# Altium PCB 3xVCO.PcbDoc
Units mm, origin at the board's own origin, x right, y up, seen from the top; angles counter-clockwise.
Board outline 69.8 x 106.5 mm, 2 copper layers (Top Layer, Bottom Layer); 122 components, 85 nets, 354 pads, 256 vias.
Unrouted connection lines stored in the file: 59.
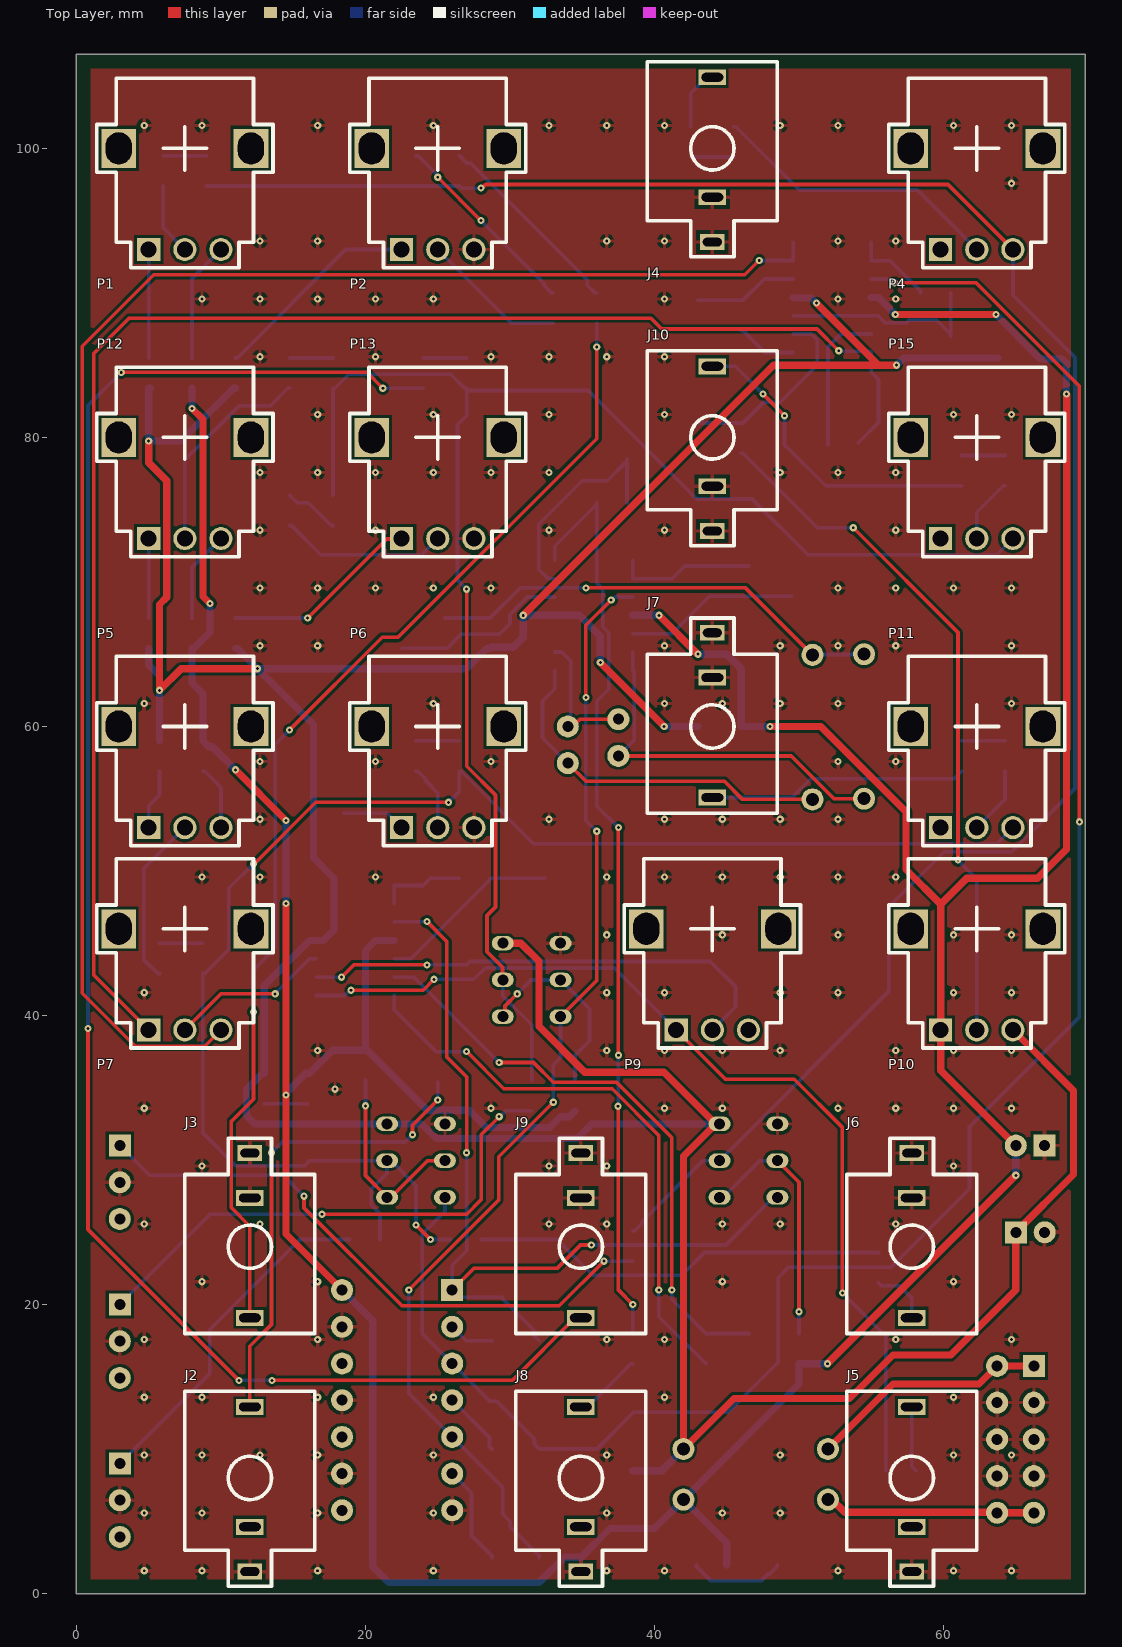
[diagram p0: Top Layer view]
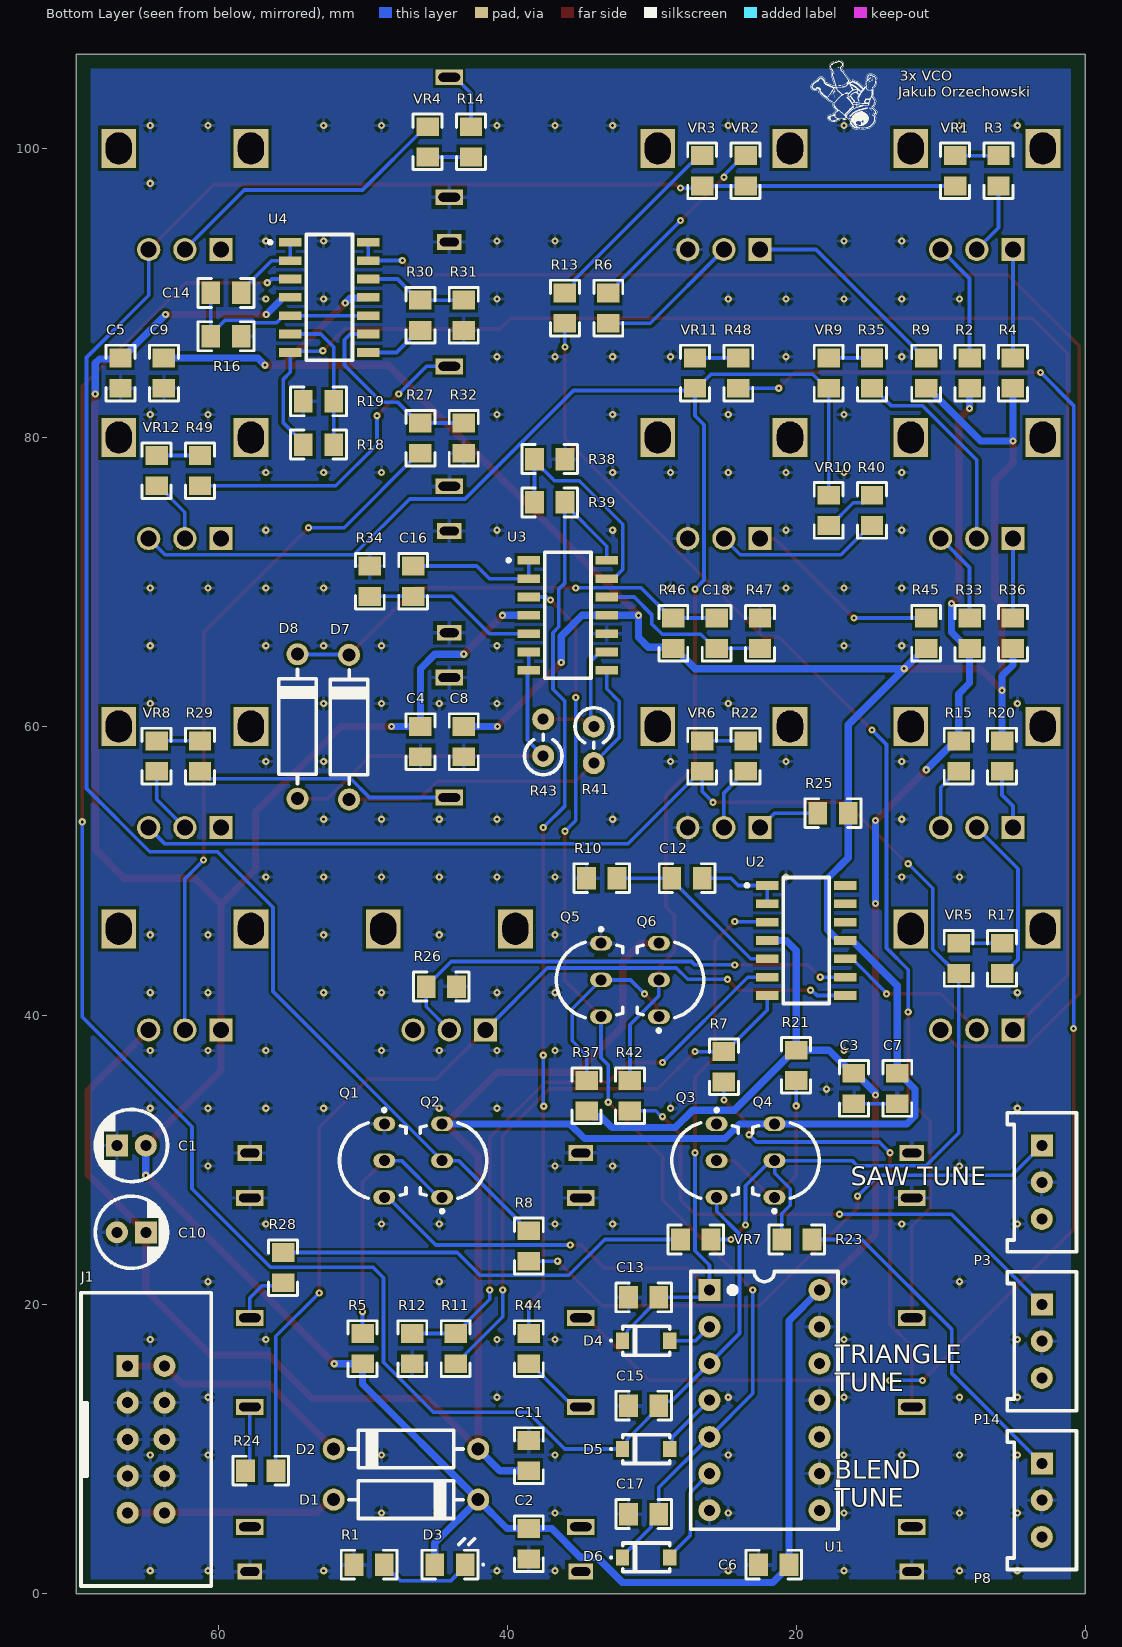
[diagram p1: Bottom Layer view, seen from below]
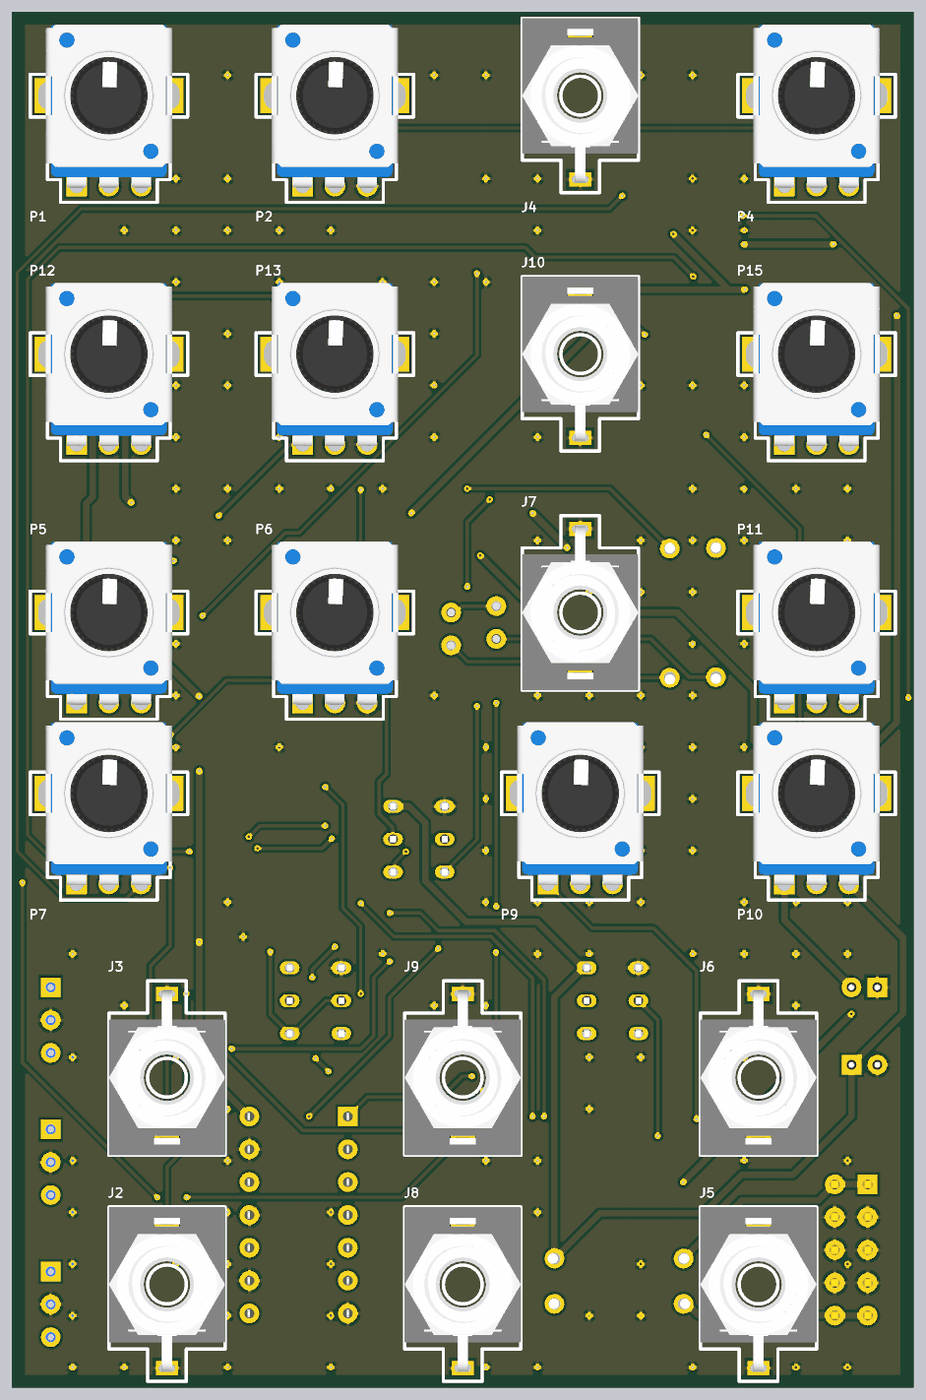
[diagram p2: 3D render of the assembled board from above, using the file's embedded part models]

## Layer stack, top to bottom
Top Solder: solder mask 0.0102, Solder Resist, Dk 3.5
Top Layer: signal copper 0.0356
Dielectric 1: dielectric 0.32, FR-4, Dk 4.8
Bottom Layer: signal copper 0.0356
Bottom Solder: solder mask 0.0102, Solder Resist, Dk 3.5

## Board outline
0,0 0,106.5 69.8,106.5 69.8,0

## Design rules (kind name [scope] priority, off if disabled: settings)
Clearance [All] p1: gap=0.2 ignorepadtopadclearanceinfootprint=FALSE except(0.25: Arc-Hole Track-Hole SMDPad-Hole THPad-Hole Via-Hole Fill-Hole Poly-Hole Region-Hole Text-Hole)
HoleSize [All] p1: absolutevalues=TRUE maxlimit=6.2 minlimit=0 maxpercent=80.000 minpercent=20.000
HoleToHoleClearance [All] p1: gap=0.3 allowstackedmicrovias=TRUE
MinimumSolderMaskSliver [All] p1: minsoldermaskwidth=0.2
PolygonConnect [All] p1: connectstyle=Relief reliefconductorwidth=0.254 reliefentries=4 polygonreliefangle="90 Angle" airgapwidth=0.254
RoutingVias [All] p1: holewidth=0.2 width=0.5 viastyle="Through Hole" minholewidth=0.15 minwidth=0.3 maxholewidth=0.711 maxwidth=1.27
SilkToSilkClearance [All] p1: silktosilkclearance=0.15
SilkToSolderMaskClearance [IsPad] p1: minsilkscreentomaskgap=0.1 clearancetoexposedcopper=TRUE
SolderMaskExpansion [All] p1: expansion=0.05 istentingtop=FALSE
SupplyNets "Schematic Supply Nets_2" [InNet('-12 V')] p1: voltage=0.000
SupplyNets "Schematic Supply Nets_1" [InNet('GND')] p2: voltage=0.000
SupplyNets "Schematic Supply Nets" [InNet('+12 V')] p3: voltage=0.000
Width [All] p1: maxlimit=0.5 minlimit=0.2 preferedwidth=0.254
25 further rules are at their usual default settings.

## Classes and differential pairs
component class "Triangle VCO": C16 C17 C18 D6 D7 D8 J8 J9 J10 P12 P13 P14 P15 Q5 Q6 R33 R34 R35 R36 R37 R38 R39 R40 R41 R42 R43 R44 R45 R46 R47 R48 R49 U3 VR9 VR10 VR11 VR12
component class "Blend VCO": C14 C15 D5 J5 J6 J7 P5 P6 P7 P8 P9 P10 P11 Q3 Q4 R15 R16 R17 R18 R19 R20 R21 R22 R23 R24 R25 R26 R27 R28 R29 R30 R31 R32 U4 VR5 VR6 VR7 VR8
component class "Saw VCO": C12 C13 D4 J2 J3 J4 P1 P2 P3 P4 Q1 Q2 R2 R3 R4 R5 R6 R7 R8 R9 R10 R11 R12 R13 R14 U1 U2 VR1 VR2 VR3 VR4
component class "Power section": C1 C2 C3 C4 C5 C6 C7 C8 C9 C10 C11 D1 D2 D3 J1 R1

## Components (designator, comment, footprint, x,y, rotation, side; value= is the part's Value field where it differs from the comment)
C1 "CAP" "Cap electrolytic THT 5mm" 67,31 r180 bottom value=47uF
C2 "CAP" "Cap SMD 0805" 38.5,2.4 r90 bottom value=100nF
C3 "CAP" "Cap SMD 0805" 16,33.9 r90 bottom value=100nF
C4 "CAP" "Cap SMD 0805" 46,57.9 r90 bottom value=100nF
C5 "CAP" "Cap SMD 0805" 66.75,83.4 r90 bottom value=100nF
C6 "CAP" "Cap SMD 0805" 22.6,2 r180 bottom value=100nF
C7 "CAP" "Cap SMD 0805" 13,36 r270 bottom value=100nF
C8 "CAP" "Cap SMD 0805" 43,60 r270 bottom value=100nF
C9 "CAP" "Cap SMD 0805" 63.75,85.5 r270 bottom value=100nF
C10 "CAP" "Cap electrolytic THT 5mm" 65,25 r0 bottom value=47uF
C11 "CAP" "Cap SMD 0805" 38.5,8.5 r90 bottom value=100nF
C12 "CAP" "Cap SMD 0805" 28.6,49.5 r180 bottom value=1uF
C13 "CAP" "Cap SMD 0805" 31.6,20.5 r180 bottom value=2,2nF
C14 "CAP" "Cap SMD 0805" 60.5,90 r180 bottom value=1uF
C15 "CAP" "Cap SMD 0805" 31.6,13 r180 bottom value=2,2nF
C16 "CAP" "Cap SMD 0805" 46.5,69 r90 bottom value=1uF
C17 "CAP" "Cap SMD 0805" 31.6,5.5 r180 bottom value=2,2nF
C18 "CAP" "Cap SMD 0805" 25.5,65.4 r90 bottom value=1uF
D1 "SCHOTTKY" "Diode THT 10 mm" 52,6.5 r180 bottom
D2 "SCHOTTKY" "Diode THT 10 mm" 42,10 r0 bottom
D3 "LED" "LED SMD 0805" 45,2 r180 bottom
D4 "DIODE" SOD-123 28.75,17.5 r0 bottom
D5 "DIODE" SOD-123 28.75,10 r0 bottom
D6 "DIODE" SOD-123 28.75,2.5 r0 bottom
D7 "DIODE" "Diode THT 10 mm" 50.933,54.952 r90 bottom
D8 "DIODE" "Diode THT 10 mm" 54.5,55 r90 bottom
J1 "IDC 10" "IDC 10 PIN" 66.25,15.75 r0 bottom
J2 "JACK Mono" PJ301M 12,8 r0 top
J3 "JACK Mono" PJ301M 12,24 r180 top
J4 "JACK Mono" PJ301M 44,100 r0 top
J5 "JACK Mono" PJ301M 57.8,8 r0 top
J6 "JACK Mono" PJ301M 57.8,24 r180 top
J7 "JACK Mono" PJ301M 44,60 r180 top
J8 "JACK Mono" PJ301M 34.9,8 r0 top
J9 "JACK Mono" PJ301M 34.9,24 r180 top
J10 "JACK Mono" PJ301M 44,80 r0 top
P1 "Mono Pot" "9 mm PCB Potentiometer" 7.5,100 r0 top value=B100k
P2 "Mono Pot" "9 mm PCB Potentiometer" 25,100 r0 top value=B100k
P3 "VR" "Multiturn Potentiometer inline" 3,31 r270 bottom value=1k
P4 "VR" "9 mm PCB Potentiometer" 62.3,100 r0 top value=B1Meg
P5 "Mono Pot" "9 mm PCB Potentiometer" 7.5,60 r0 top value=B100k
P6 "Mono Pot" "9 mm PCB Potentiometer" 25,60 r0 top value=B100k
P7 "Mono Pot" "9 mm PCB Potentiometer" 7.5,46 r0 top value=B1Meg
P8 "VR" "Multiturn Potentiometer inline" 3,9 r270 bottom value=1k
P9 "VR" "9 mm PCB Potentiometer" 44,46 r0 top value=B100k
P10 "Mono Pot" "9 mm PCB Potentiometer" 62.3,46 r0 top value=B100k
P11 "VR" "9 mm PCB Potentiometer" 62.3,60 r0 top value=B1Meg
P12 "Mono Pot" "9 mm PCB Potentiometer" 7.5,80 r0 top value=B100k
P13 "Mono Pot" "9 mm PCB Potentiometer" 25,80 r0 top value=B100k
P14 "VR" "Multiturn Potentiometer inline" 3,20 r270 bottom value=1k
P15 "VR" "9 mm PCB Potentiometer" 62.3,80 r0 top value=B1Meg
Q1 "BC548" "TO-92 wide" 48.5,27.42 r90 bottom
Q2 "BC558" "TO-92 wide" 44.5,32.5 r270 bottom
Q3 "BC548" "TO-92 wide" 25.5,27.42 r90 bottom
Q4 "BC558" "TO-92 wide" 21.5,32.5 r270 bottom
Q5 "BC548" "TO-92 wide" 33.5,39.92 r90 bottom
Q6 "BC558" "TO-92 wide" 29.5,45 r270 bottom
R1 "RES" "Resistor SMD 0805" 48.5,2 r0 bottom value=10k
R2 "RES" "Resistor SMD 0805" 8,85.5 r270 bottom value=100k
R3 "RES" "Resistor SMD 0805" 6,99.5 r270 bottom value=100k
R4 "RES" "Resistor SMD 0805" 5,83.4 r90 bottom value=33k
R5 "RES" "Resistor SMD 0805" 50,15.9 r90 bottom value=1Meg
R6 "RES" "Resistor SMD 0805" 33,90 r270 bottom value=1Meg
R7 "RES" "Resistor SMD 0805" 25,37.5 r270 bottom value=1k
R8 "RES" "Resistor SMD 0805" 38.5,25.1 r270 bottom value=1k5
R9 "RES" "Resistor SMD 0805" 11,83.4 r90 bottom value=100k
R10 "RES" "Resistor SMD 0805" 32.4,49.5 r0 bottom value=100k
R11 "RES" "Resistor SMD 0805" 43.559,18 r270 bottom value=100k
R12 "RES" "Resistor SMD 0805" 46.559,18 r270 bottom value=47k
R13 "RES" "Resistor SMD 0805" 36,90 r270 bottom value=100k
R14 "RES" "Resistor SMD 0805" 42.5,99.4 r90 bottom value=100k
R15 "RES" "Resistor SMD 0805" 8.75,56.9 r90 bottom value=100k
R16 "RES" "Resistor SMD 0805" 60.5,87 r180 bottom value=100k
R17 "RES" "Resistor SMD 0805" 5.75,45 r270 bottom value=100k
R18 "RES" "Resistor SMD 0805" 52,79.5 r0 bottom value=100k
R19 "RES" "Resistor SMD 0805" 52,82.5 r0 bottom value=47k
R20 "RES" "Resistor SMD 0805" 5.75,59 r270 bottom value=33k
R21 "RES" "Resistor SMD 0805" 20,37.6 r270 bottom value=1Meg
R22 "RES" "Resistor SMD 0805" 23.5,59 r270 bottom value=1Meg
R23 "RES" "Resistor SMD 0805" 21,24.5 r180 bottom value=1k5
R24 "RES" "Resistor SMD 0805" 56,8.5 r0 bottom value=1k
R25 "RES" "Resistor SMD 0805" 16.4,54 r0 bottom value=100k
R26 "RES" "Resistor SMD 0805" 43.5,42 r0 bottom value=68k
R27 "RES" "Resistor SMD 0805" 46,78.9 r90 bottom value=100k
R28 "RES" "Resistor SMD 0805" 55.5,23.6 r270 bottom value=100k
R29 "RES" "Resistor SMD 0805" 61.25,59 r270 bottom value=100k
R30 "RES" "Resistor SMD 0805" 46,87.4 r90 bottom value=100k
R31 "RES" "Resistor SMD 0805" 43,87.4 r90 bottom value=68k
R32 "RES" "Resistor SMD 0805" 43,78.9 r90 bottom value=14k
R33 "RES" "Resistor SMD 0805" 8,67.5 r270 bottom value=100k
R34 "RES" "Resistor SMD 0805" 49.5,69 r90 bottom value=100k
R35 "RES" "Resistor SMD 0805" 14.75,85.5 r270 bottom value=100k
R36 "RES" "Resistor SMD 0805" 5,65.4 r90 bottom value=33k
R37 "RES" "Resistor SMD 0805" 34.5,33.4 r90 bottom value=1Meg
R38 "RES" "Resistor SMD 0805" 36,78.5 r0 bottom value=20k
R39 "RES" "Resistor SMD 0805" 38.1,75.5 r180 bottom value=100k
R40 "RES" "Resistor SMD 0805" 14.75,76 r270 bottom value=1Meg
R41 "RES" "Resistor THT vertical" 34,60 r270 bottom value=10k
R42 "RES" "Resistor SMD 0805" 31.5,35.5 r270 bottom value=1k5
R43 "RES" "Resistor THT vertical" 37.5,57.96 r90 bottom value=10k
R44 "RES" "Resistor SMD 0805" 38.5,18 r270 bottom value=1k
R45 "RES" "Resistor SMD 0805" 11,65.4 r90 bottom value=100k
R46 "RES" "Resistor SMD 0805" 28.5,67.5 r270 bottom value=10k
R47 "RES" "Resistor SMD 0805" 22.5,65.4 r90 bottom value=100k
R48 "RES" "Resistor SMD 0805" 24,85.5 r270 bottom value=100k
R49 "RES" "Resistor SMD 0805" 61.25,78.75 r270 bottom value=100k
U1 "CD40106" "DIP-14 socket" 26,21 r180 bottom
U2 "TL074CDR" SOIC14 22,49 r180 bottom
U3 "TL074CDR" SOIC14 38.5,71.5 r180 bottom
U4 "TL074CDR" SOIC14 55,93.5 r180 bottom
VR1 "NTC" "Thermistor SMD 0805" 9,99.5 r270 bottom value=10k
VR2 "NTC" "Thermistor SMD 0805" 23.5,99.5 r270 bottom value=10k
VR3 "NTC" "Thermistor SMD 0805" 26.5,99.5 r270 bottom value=10k
VR4 "NTC" "Thermistor SMD 0805" 45.5,99.4 r90 bottom value=10k
VR5 "NTC" "Thermistor SMD 0805" 8.75,45 r270 bottom value=10k
VR6 "NTC" "Thermistor SMD 0805" 26.5,59 r270 bottom value=10k
VR7 "NTC" "Thermistor SMD 0805" 28,24.5 r180 bottom value=10k
VR8 "NTC" "Thermistor SMD 0805" 64.25,59 r270 bottom value=10k
VR9 "NTC" "Thermistor SMD 0805" 17.75,85.5 r270 bottom value=10k
VR10 "NTC" "Thermistor SMD 0805" 17.75,73.9 r90 bottom value=10k
VR11 "NTC" "Thermistor SMD 0805" 27,85.5 r270 bottom value=10k
VR12 "NTC" "Thermistor SMD 0805" 64.25,78.75 r270 bottom value=10k

## Footprints (in the part's own frame and the unit in brackets; to place one, negate y for a bottom-side part, rotate by r counter-clockwise, add the part's x,y. Pads: shape width x height; smd on the part's side, far side on the other; paste and mask are expansions set on the pad)
"9 mm PCB Potentiometer" [mm] "Generic 9 mm shaft potentiometer PCB mount"
  rect 1.6x1.6 hole 1.1: 1(-2.5,-7)
  round 1.6 hole 1.1: 2(0,-7) 3(2.5,-7)
  rect 2.4x2.7 hole 1.8 slot 2.2 at 90 deg: 11(-4.575,0) 11(4.575,0)
  silkscreen extent -6.1,-8.25 6.1,4.85, body extent -5.66,-7.1 5.66,5.5, height 25
"Cap electrolytic THT 5mm" [mil] "THT electrolytic capacitor 5 mm diameter"
  rect 60x60 hole 30: 1(0,0)
  round 60 hole 30: 2(78.74,0)
  silkscreen extent -59,-98 138,98, body extent -59,-98 137,98, height 354
"Cap SMD 0805" [mm] "SMD non polarised 0805 capacitor"
  rect 1.3x1.55 smd: 1(0,0) 2(2.1,0)
  silkscreen extent -0.87,-1 2.98,1, body extent -0.1,-0.72 2.2,0.72, height 0.7
"Diode THT 10 mm" [mil] "THT axial diode 10 mm pitch"
  round 60 hole 35.43: 1(0,0) 2(393.7,0)
  silkscreen extent 41,-51 352,51, body extent -21,-53 411,53, height 107
"DIP-14 socket" [mil] "Socket for DIP-14 ICs"
  rect 60x60 hole 30: 1(0,0)
  round 60 hole 30: 2(0,-100) 3(0,-200) 4(0,-300) 5(0,-400) 6(0,-500) 7(0,-600) 8(300,-600) 9(300,-500) 10(300,-400) 11(300,-300) 12(300,-200) 13(300,-100) 14(300,0)
  silkscreen extent -51,-651 350,50, body extent -50,-660 352,60, height 310
"IDC 10 PIN" [mil] "10 PIN IDC Connector"
  rect 60x60 hole 30: 1(0,0)
  round 60 hole 30: 2(-100,0) 3(0,100) 4(-100,100) 5(0,200) 6(-100,200) 7(0,300) 8(-100,300) 9(0,400) 10(-100,400)
  silkscreen extent -227,-200 127,600, body extent -223,-204 127,604, height 354
"LED SMD 0805" [mm] "SMD LED diode 0805 package"
  rect 1.3x1.55 smd: 1(0,0) 2(2.1,0)
  silkscreen extent -0.87,-1 3.36,1.8, body extent 0.05,-0.63 2.05,0.63, height 0.8
"Multiturn Potentiometer inline" [mil] "PCB mount inline multiturn trimmer pot with parameter label"
  rect 60x60 hole 30: 1(0,0)
  round 60 hole 30: 2(100,0) 3(200,0)
  silkscreen extent -89,-94 289,94, body extent -89,-95 289,95, height 454
PJ301M [mm] "3,5 mm Jack mono PCB Mount"
  rect 1.7x1.1 hole 0.6 slot 1.3 at 0 deg: 1(0,-6.48)
  rect 1.9x1.1 hole 0.6 slot 1.5 at 0 deg: 2(0,-3.38) 3(0,4.92)
  silkscreen extent -4.5,-7.5 4.5,6, body extent -4.5,-6.73 4.5,6, height 14
"Resistor SMD 0805" [mm] "SMD resistor 0805 package"
  rect 1.3x1.55 smd: 1(0,0) 2(2.1,0)
  silkscreen extent -0.87,-1 2.98,1, body extent -0.1,-0.72 2.2,0.72, height 0.7
"Resistor THT vertical" [mil] "THT axial resistor 10 mm pitch"
  round 60 hole 30: 1(0,0) 2(100,0)
  silkscreen extent -51,-51 59,51, body extent -49,-49 112,49, height 406
SOD-123 [mm]
  rect 0.91x1.12 smd: 1(0,0) 2(3.27,0)
  silkscreen extent 0,-1 4.06,1, body extent -0.29,-0.85 3.56,0.85, height 1.35
SOIC14 [mm] "SOIC14 SMD package"
  rect 1.55x0.6 smd: 1(0,0) 2(0,-1.27) 3(0,-2.54) 4(0,-3.81) 5(0,-5.08) 6(0,-6.35) 7(0,-7.62) 8(5.4,-7.62) 9(5.4,-6.35) 10(5.4,-5.08) 11(5.4,-3.81) 12(5.4,-2.54) 13(5.4,-1.27) 14(5.4,0)
  silkscreen extent -1.5,-8.17 4.3,0.55, body extent -0.4,-8.19 5.8,0.57, height 1.75
"Thermistor SMD 0805" [mm] "SMD thermistor 0805 package"
  rect 1.3x1.55 smd: 1(0,0) 2(2.1,0)
  silkscreen extent -0.87,-1 2.98,1, body extent -0.1,-0.72 2.2,0.72, height 0.7
"TO-92 wide" [mil] "TO-92 THT package wide legs"
  oval 39.37x60 hole 30: 1(0,0) 2(100,0) 3(200,0)
  silkscreen extent -3,-59 242,122, body extent -9,-61 209,104, height 323

## Part data
C1 C10: library part "Capacitor Electr THT 5mm", "THT Electrolytic Capacitor 5 mm Diameter", Package Type=THT
C2 C3 C4 C5 C6 C7 C8 C9 C11 C12 C13 C14 C15 C16 C17 C18: library part "Capacitor SMD 0805", "SMD Capacitor Non-Polarised 0805 Package", Package Type=SMD
D1 D2: library part "Schottky Diode THT", "Generic THT Axial Schottky Diode 10 mm Pitch", Package Type=THT, Model=1N5819, Type=Schottky
D3: library part "LED SMD", "SMD LED Diode 0805 Package", Color=GREEN, Package Type=SMD, Type=LED
D4 D5 D6: library part "Diode SMD SOD123", "Generic SMD Diode SOD123 Package", Package Type=SMD, Model=1N4148W, Type=Diode
D7 D8: library part "Diode THT", "Generic THT Axial Diode 10 mm Pitch", Package Type=THT, Model=1N4148, Type=Diode
J1: library part "IDC 10 pin", "10 Pin IDC Connector"
J2 J3 J4 J5 J6 J7 J8 J9 J10: library part PJ301M, "PJ301M Eurorack 3,5 mm Patch Socket PCB Mount", Package Type=THT
  J2: Label="SAW OUT"
  J3 J6 J9: Label="CV 1V/OCT"
  J4 J7 J10: Label="FM CV"
  J5: Label="BLEND OUT"
  J8: Label="TRIANGLE OUT"
P1 P2 P5 P6 P7 P10 P12 P13: library part "Potentiometer 9 mm", "PCB Mount 9mm Mono Potentiometer THT", Package Type=THT, Type=Potentiometer
  P1 P5 P12: Parameter="F COARSE"
  P2 P6 P13: Parameter="F FINE"
  P7: Parameter="SHAPE BLEND"
  P10: Parameter="PWM WIDTH"
P3 P8 P14: library part "VR A Multiturn THT", "PCB Mount Multiturn Trimmer Potentiometer Top Adjustable as Variable Resistor Clockwise Increase", Package Type=THT, Parameter=TUNE, Type=Potentiometer
P4 P11 P15: library part "VR B 9 mm", "PCB Mount 9mm Mono Potentiometer THT as Variable Resistor Clockwise Decrease", Package Type=THT, Parameter="FM CV LVL", Type=Potentiometer
P9: library part "VR A 9 mm", "PCB Mount 9mm Mono Potentiometer THT as Variable Resistor Clockwise Increase", Package Type=THT, Parameter=COMPENSATION, Type=Potentiometer
Q1 Q3 Q5: "BC548 NPN Transistor THT TO-92 Package", Package=TO-92, Package Type=THT, Type="NPN Transistor"
Q2 Q4 Q6: "BC558 PNP Transistor THT TO-92 Package", Package=TO-92, Package Type=THT, Type="PNP Transistor"
R1 R2 R3 R4 R5 R6 R7 R8 R9 R10 R11 R12 R13 R14 R15 R16 R17 R18 R19 R20 R21 R22 R23 R24 R25 R26 R27 R28 R29 R30 R31 R32 R33 R34 R35 R36 R37 R38 R39 R40 R42 R44 R45 R46 R47 R48 R49: library part "Resistor SMD 0805", "SMD Resistor 0805 package", Package Type=SMD
R41 R43: library part "Resistor THT", "THT Axial Resistor 10mm Pitch", Package Type=THT
U1: library part "CD40106 DIP-14", "CD40106 Hex Schmitt Trigger Inverter DIP-14 Package", Package=DIP-14, Package Type=THT, Type="Schmitt Trigger"
U2 U3 U4: library part "TL074CDR SOIC14", "TL074CDR Quad Op-Amp SOIC14 Package", Package=SOIC14, Package Type=SMD, Type="Op Amp"
VR1 VR2 VR3 VR4 VR5 VR6 VR7 VR8 VR9 VR10 VR11 VR12: library part "Thermistor NTC SMD 0805", "SMD NTC Thermistor 0805 package", Package Type=SMD

## Via types
v1: diameter 0.5, hole 0.2, Top Layer to Bottom Layer, 256 vias

## Nets (pads, with @x,y where several pads share a name; then routed paths per layer and width w, separated by ;. In a path a pad name is that pad's centre, name@x,y a point inside that pad or via, vN(x,y) a via of type N, cw(c..) or ccw(c..) an arc to the next point about the centre after c; other vN are vias at no path point)
"1V/OCT BLEND": J6.3 R28.2 | length 4.1
  Bottom Layer w0.254: R28.2 55.707,21.293 56.957,21.293 57.8,20.45 J6.3
"1V/OCT SAW": J3.3 R13.2 | length 80.5
  Top Layer w0.254: J3.3 12,25.418 10.723,26.695 10.723,32.675 12.25,34.202 v1(12.25,40.25) ; v1(14.75,59.75) 21.165,66.165 22.259,66.165 36,79.906 v1(36,86.25)
  Bottom Layer w0.254: v1(12.25,40.25) 12.25,43.163 13.75,44.663 13.75,58.75 v1(14.75,59.75) ; v1(36,86.25) R13.2
"1V/OCT TRIANGLE": J9.3 R48.2 | length 121.8
  Top Layer w0.254: v1(0.8,39.1) 0.8,25.2 v1(11.25,14.75) ; v1(3.1,84.5) 20.1,84.5 v1(21.2,83.4) ; v1(13.525,14.75) 30.17,14.75 34.5,19.08 J9.3
  Bottom Layer w0.254: v1(0.8,39.1) 0.8,82.2 v1(3.1,84.5) ; v1(11.25,14.75) v1(13.525,14.75) ; v1(21.2,83.4) R48.2
"+12 V": C1.2 C2.2 C3.2 C4.2 C5.2 C6.2 D1.2 D3.1 P10.1 R2.2 R5.1 R15.2 R21.1 R33.2 R37.1 U1.14 U2.4 U3.4 U4.4 | length 298.8
  Top Layer w0.5: v1(8,82) 8.75,81.25 8.75,69 v1(9.25,68.5) ; v1(11,57) v1(14.5,53.5) ; v1(14.5,47.75) v1(14.5,34.5) 14.5,24.88 U1.14 ; v1(40.31,67.69) v1(43,65) ; v1(48,60) 51.5,60 57.401,54.099 57.401,50.099 59.8,47.7 ; v1(51.961,15.9) v1(65,28.939) ; v1(56.665,88.5) v1(63.625,88.5) ; C1.2 59.8,36.2 P10.1 59.8,47.7 ; v1(68.5,83) 68.525,82.975 68.525,58.464 68.5,58.439 68.5,51.5 66.5,49.5 61.6,49.5 59.8,47.7
  Bottom Layer w0.5: v1(8,82) R2.2 ; v1(9.25,68.5) 9.25,66.525 8.125,65.4 R33.2 8,63 8.75,62.25 R15.2 9.15,58.6 9.4,58.6 v1(11,57) ; v1(14.5,34.5) 14.5,34.625 15.875,36 C3.2 16.125,36 17.725,37.6 R21.1 ; v1(14.5,47.75) v1(14.5,53.5) ; U1.14 20.5,18.88 C6.2 ; C6.2@20.5,1.875 21.6,0.775 32.025,0.775 33.77,2.52 34.936,2.52 36.916,4.5 C2.2 40,4.5 D1.2 ; U2.4 20.69,45.19 20,44.5 R21.1 ; R37.1 34.1,33 33.5,33 32.75,32.25 28.363,32.25 27.163,33.45 24.275,33.45 20.125,37.6 R21.1 ; U3.4 v1(40.31,67.69) ; v1(43,65) 45,65 46,64 C4.2 v1(48,60) ; D3.1 45,3.5 D1.2 ; v1(51.961,15.9) R5.1 50,14.5 D1.2 ; U4.4 55.475,89.69 v1(56.665,88.5) ; v1(63.625,88.5) 66.625,85.5 C5.2 66.818,85.432 68.207,85.432 68.5,85.139 v1(68.5,83) ; v1(65,28.939) C1.2
"-12 V": C7.1 C8.1 C9.1 C10.1 C11.1 D2.1 P10.3 Q2.1 Q4.1 Q6.1 R4.1 R9.1 R20.1 R25.1 R36.1 R45.1 R46.2 U2.11 U3.11 U4.11 | length 299.9
  Top Layer w0.5: v1(5,79.75) 5,78.25 6.25,77 6.25,68.94 5.75,68.44 v1(5.75,62.5) 7.25,64 v1(12.525,64) ; Q6.1 30.75,45 32,43.75 32,39.25 35.174,36.076 40.662,36.076 Q2.1@44.238,32.5 ; v1(30.915,67.69) 48.225,85 55.5,85 ; v1(36.25,64.419) v1(40.669,60) ; Q2.1 Q2.1@44.238,32.5 ; v1(51.2,89.3) 55.5,85 ; v1(56.75,85) 55.5,85 ; P10.3 69,34.8 69,29 C10.1 65,21 60.5,16.5 56.5,16.5 53.5,13.5 45.5,13.5 D2.1 42,30.262 Q2.1@44.238,32.5
  Bottom Layer w0.5: R36.1 5,64.25 5.75,63.5 v1(5.75,62.5) R20.1 ; R4.1@5.125,83.4 R4.1 v1(5,79.75) 7.225,79.75 10.875,83.4 R9.1 ; R45.1 11.125,65.4 v1(12.525,64) ; R46.2 28.375,65.4 26.975,64 v1(12.525,64) ; R46.2@28.625,65.4 28.707,65.482 30.232,65.482 30.915,66.165 v1(30.915,67.69) U3.11 34.81,67.69 36.25,66.25 v1(36.25,64.419) ; C11.1 40.5,8.5 D2.1 ; v1(40.669,60) C8.1 ; Q2.1 35.661,32.5 34.641,31.48 24.914,31.48 23.894,32.5 Q4.1 12.339,32.5 11.775,33.064 11.775,34.9 12.875,36 C7.1 13,42.065 16.125,45.19 U2.11 17.075,45.19 17.825,45.94 17.825,49.486 16.4,50.911 R25.1 16.4,60.125 v1(12.525,64) ; U4.11 49.65,89.64 50.86,89.64 v1(51.2,89.3) ; v1(56.75,85) 57.25,85.5 C9.1
"BLEND out": J5.3 R24.2 | length 4.5
  Bottom Layer w0.254: J5.3 57.8,8.8 R24.2
"FM CV BLEND": J7.3 R29.2 | length 18
  Bottom Layer w0.254: J7.3 49.521,55.08 50.818,56.377 60.727,56.377 R29.2
"FM CV SAW": J4.3 R14.2 | length 4.3
  Bottom Layer w0.254: R14.2 42.5,103.82 43.6,104.92 J4.3
"FM CV TRIANGLE": J10.3 R49.2 | length 21.8
  Top Layer w0.254: v1(47.5,83) v1(49,81.5)
  Bottom Layer w0.254: J10.3 45.58,84.92 v1(47.5,83) ; v1(49,81.5) 49,79.5 51.85,76.65 R49.2
GND: C1.1 C2.1 C3.1 C4.1 C5.1 C6.1 C7.2 C8.2 C9.2 C10.2 C11.2 C13.1 C15.1 C17.1 J1.3 J1.4 J1.5 J1.6 J1.7 J1.8 J2.1 J3.1 J3.2 J4.1 J4.2 J5.1 J6.1 J6.2 J7.1 J7.2 J8.1 J9.1 J9.2 J10.1 J10.2 P2.3 P3.2 P6.3 P8.2 P13.3 P14.2 Q1.3 Q3.3 Q5.3 R1.2 R10.2 R12.2 R16.2 R19.2 R26.1 R31.1 R32.1 R34.2 R38.1 R47.2 U1.7 U1.9 U1.11 U1.13 U3.10 | length 3
  Bottom Layer w0.254: C7.2 C3.1
  other v1: 4.694,1.581 8.694,1.581 16.694,1.581 24.694,1.581 36.694,1.581 40.694,1.581 52.694,1.581 60.694,1.581 64.694,1.581 4.694,5.581 8.694,5.581 16.694,5.581 24.694,5.581 36.694,5.581 44.694,5.581 48.694,5.581 4.694,9.581 8.694,9.581 12.694,9.581 16.694,9.581 24.694,9.581 36.694,9.581 48.694,9.581 60.694,9.581 64.694,9.581 4.694,13.581 8.694,13.581 16.694,13.581 24.694,13.581 40.694,13.581 60.694,13.581 4.694,17.581 16.694,17.581 36.694,17.581 40.694,17.581 56.694,17.581 64.694,17.581 8.694,21.581 16.694,21.581 44.694,21.581 60.694,21.581 4.694,25.581 12.694,25.581 32.694,25.581 36.694,25.581 44.694,25.581 48.694,25.581 56.694,25.581 8.694,29.581 32.694,29.581 36.694,29.581 60.694,29.581 4.694,33.581 28.694,33.581 40.694,33.581 44.694,33.581 52.694,33.581 56.694,33.581 60.694,33.581 64.694,33.581 17.9,34.9 16.694,37.581 36.694,37.581 40.694,37.581 44.694,37.581 48.694,37.581 56.694,37.581 60.694,37.581 64.694,37.581 4.694,41.581 36.694,41.581 40.694,41.581 48.694,41.581 52.694,41.581 60.694,41.581 64.694,41.581 36.694,45.581 44.694,45.581 52.694,45.581 60.694,45.581 64.694,45.581 8.694,49.581 12.694,49.581 20.694,49.581 36.694,49.581 40.694,49.581 44.694,49.581 48.694,49.581 52.694,49.581 56.694,49.581 12.694,53.581 32.694,53.581 40.694,53.581 44.694,53.581 48.694,53.581 52.694,53.581 12.694,57.581 20.694,57.581 28.694,57.581 52.694,57.581 56.694,57.581 4.694,61.581 24.694,61.581 40.694,61.581 44.694,61.581 48.694,61.581 52.694,61.581 64.694,61.581 12.694,65.581 16.694,65.581 40.694,65.581 48.694,65.581 52.694,65.581 56.694,65.581 64.694,65.581 12.694,69.581 16.694,69.581 20.694,69.581 24.694,69.581 28.694,69.581 52.694,69.581 56.694,69.581 60.694,69.581 64.694,69.581 12.694,73.581 20.694,73.581 32.694,73.581 40.694,73.581 56.694,73.581 12.694,77.581 16.694,77.581 20.694,77.581 24.694,77.581 28.694,77.581 32.694,77.581 48.694,77.581 52.694,77.581 56.694,77.581 16.694,81.581 24.694,81.581 32.694,81.581 40.694,81.581 60.694,81.581 64.694,81.581 12.694,85.581 20.694,85.581 28.694,85.581 32.694,85.581 36.694,85.581 40.694,85.581 8.694,89.581 12.694,89.581 16.694,89.581 20.694,89.581 24.694,89.581 40.694,89.581 52.694,89.581 56.694,89.581 12.694,93.581 16.694,93.581 36.694,93.581 40.694,93.581 52.694,93.581 56.694,93.581 64.694,97.581 4.694,101.581 8.694,101.581 16.694,101.581 24.694,101.581 32.694,101.581 36.694,101.581 40.694,101.581 48.694,101.581 52.694,101.581 60.694,101.581 64.694,101.581
NetC12_1: C12.1 R10.1 U2.5 | length 12.8
  Bottom Layer w0.254: U2.5 23.145,43.92 28.6,49.375 C12.1 R10.1
NetC12_2: C12.2 U2.1 U2.2 | length 6
  Bottom Layer w0.254: U2.2 U2.1 24,49 24.5,49.5 C12.2
NetC13_2: C13.2 D4.2 Q1.1 U1.1 U2.3 | length 62.2
  Top Layer w0.254: v1(24.25,46.5) 25.625,45.125 25.625,37.125 27,35.75 v1(27,30.5) ; U1.1 27.5,22.5 33.25,22.5 34.873,24.123 v1(35.627,24.123)
  Bottom Layer w0.254: U2.3 22.02,46.48 24.23,46.48 v1(24.25,46.5) ; v1(27,30.5) 27,23.713 26,22.713 U1.1 26.5,20.5 C13.2 29.5,20.375 31.692,18.183 31.692,17.828 D4.2 ; v1(35.627,24.123) 44.941,24.123 48.238,27.42 Q1.1
NetC14_1: C14.1 R16.1 U4.5 U4.10 | length 14.7
  Bottom Layer w0.254: U4.10 U4.5 55.475,88.42 55.972,87.923 57.436,87.923 57.615,88.102 59.523,88.102 60.5,87.125 R16.1 C14.1
NetC14_2: C14.2 U4.1 U4.2 | length 5.7
  Bottom Layer w0.254: U4.1 U4.2 56.295,92.23 58.4,90.125 C14.2
NetC15_2: C15.2 D5.2 Q3.1 U1.3 U4.3 | length 138.5
  Top Layer w0.254: v1(56.6,90.7) 62.241,90.7 69.4,83.541 v1(69.4,53.4)
  Bottom Layer w0.254: Q3.1 25.5,26.457 23.923,24.88 23.923,17.997 U1.3 28.618,13.302 29.073,13.302 31.692,10.683 31.692,10.328 D5.2 36.013,10 38.57,12.557 45.104,12.557 48.558,16.011 48.558,21.858 49.277,22.577 56.364,22.577 61.8,28.013 61.8,32.3 69.4,39.9 v1(69.4,53.4) ; U4.3 56.273,90.96 56.533,90.7 v1(56.6,90.7)
NetC16_1: C16.1 R34.1 U3.5 | length 12.1
  Bottom Layer w0.254: U3.5 41.21,66.42 43.79,69 C16.1 R34.1
NetC16_2: C16.2 U3.1 U3.2 | length 9.6
  Bottom Layer w0.254: U3.1 U3.2 41.23,70.23 42.1,71.1 C16.2
NetC17_2: C17.2 D6.2 Q5.1 U1.5 U3.3 | length 78
  Top Layer w0.254: v1(23,21) 29.226,27.226 29.226,30.226 v1(33,34) ; Q5.1 33.56,39.92 33.905,40.265 33.905,40.325 36,42.42 v1(36,52.75) ; v1(35.25,62) 35.25,67 v1(37,68.75)
  Bottom Layer w0.254: v1(23,21) 23,13.84 U1.5 29.5,7.34 C17.2 30.023,4.977 30.023,4.602 32.02,2.605 D6.2 ; v1(33,34) 33,36.571 33.5,37.071 Q5.1 ; v1(35.25,62) 35.25,53.5 v1(36,52.75) ; v1(37,68.75) 37.067,68.75 37.277,68.96 U3.3
NetC18_1: C18.1 R47.1 U3.12 | length 12.4
  Bottom Layer w0.254: R47.1 C18.1 25.625,65.4 26.602,66.377 29.264,66.377 30,67.113 30,67.75 31.21,68.96 U3.12
NetC18_2: C18.2 D7.2 D8.2 R46.1 | length 31.8
  Top Layer w0.254: v1(35.25,69.587) 46.298,69.587 D7.2
  Bottom Layer w0.254: C18.2 R46.1 28.625,67.5 30.712,69.587 33.994,69.587 v1(35.25,69.587) ; D7.2 50.957,64.976 54.476,64.976 D8.2
NetD1_1: D1.1 J1.9 J1.10 | length 14.6
  Top Layer w0.5: D1.1 52.277,6.5 53.157,5.62 63.68,5.62 J1.10 J1.9
NetD2_2: D2.2 J1.1 J1.2 | length 16.6
  Top Layer w0.5: D2.2 56.5,14.5 62.46,14.5 J1.2 J1.1
NetD3_2: D3.2 R1.1 | length 6.7
  Bottom Layer w0.254: D3.2 42.9,1.875 43.877,0.898 47.398,0.898 47.852,1.352 47.977,1.352 48.5,1.875 R1.1
NetD4_1: D4.1 U1.2 | length 3.1
  Bottom Layer w0.254: U1.2 26.96,17.5 D4.1
NetD5_1: D5.1 U1.4 | length 4.5
  Bottom Layer w0.254: U1.4 28.588,10.792 28.588,10.162 D5.1
NetD6_1: D6.1 U1.6 | length 6.9
  Bottom Layer w0.254: U1.6 27.333,6.967 27.333,4.023 28.75,2.605 D6.1
NetD7_1: D7.1 R41.2 U3.8 | length 25.5
  Top Layer w0.254: R41.2 35.254,56.206 44.836,56.206 46.09,54.952 D7.1
  Bottom Layer w0.254: U3.8 33.1,62.6 32.25,61.75 32.25,59.21 R41.2
NetD8_1: D8.1 R43.1 U3.6 U3.7 | length 25.9
  Top Layer w0.254: R43.1 49.465,57.96 52.425,55 D8.1
  Bottom Layer w0.254: R43.1 38.589,59.049 38.589,63.791 U3.7 U3.6
NetP1_1: P1.1 R4.2 | length 7.5
  Bottom Layer w0.254: R4.2 P1.1
NetP1_2: P1.2 R3.2 | length 5
  Bottom Layer w0.254: R3.2 6,94.5 P1.2
NetP1_3: P1.3 R2.1 | length 8.3
  Bottom Layer w0.254: R2.1 8,91 P1.3
NetP2_1: P2.1 R9.2 | length 14.6
  Bottom Layer w0.254: R9.2 11.125,85.5 18.625,93 P2.1
NetP2_2: P2.2 R6.2 | length 10.1
  Bottom Layer w0.254: P2.2 30.1,87.9 R6.2
NetP3_1: P3.1 R8.2 | length 41.9
  Top Layer w0.254: v1(15.75,27.5) 15.75,26.684 22.523,19.911 33.411,19.911 v1(36.5,23)
  Bottom Layer w0.254: P3.1 5.044,28.956 14.294,28.956 v1(15.75,27.5) ; v1(36.5,23) R8.2
NetP4_2: P4.2 VR4.2 | length 20.3
  Bottom Layer w0.254: VR4.2 45.625,101.5 50.008,97.117 58.183,97.117 P4.2
NetP4_3: P4.3 Q2.2 R8.1 VR1.2 VR2.2 VR3.2 | length 143.7
  Top Layer w0.254: v1(28,97.25) 28.067,97.25 28.314,97.497 60.303,97.497 P4.3
  Bottom Layer w0.254: VR1.2 VR2.2 VR3.2 26.65,97.25 v1(28,97.25) ; R8.1 38.625,25.1 39.148,25.623 39.148,25.748 43.36,29.96 Q2.2 44.56,29.96 44.905,30.305 44.905,30.365 56.198,41.658 56.198,47.485 60.04,51.327 64.721,51.327 69.1,55.706 69.1,85.537 64.8,89.837 P4.3
NetP5_1: P5.1 R20.2 | length 4.2
  Bottom Layer w0.254: P5.1 5,54.5 5.75,55.25 R20.2
NetP5_2: P5.2 R17.2 | length 11.8
  Bottom Layer w0.254: R17.2 5.625,42.9 4.648,43.877 4.648,50.148 P5.2
NetP5_3: P5.3 R15.1 | length 4.5
  Bottom Layer w0.254: R15.1 8.875,56.9 10,55.775 P5.3
NetP6_1: P6.1 R25.2 | length 4.4
  Bottom Layer w0.254: R25.2 21.5,54 P6.1
NetP6_2: P6.2 R22.2 | length 4.6
  Bottom Layer w0.254: R22.2 23.625,56.9 24.148,56.377 24.148,56.252 25,55.4 P6.2
NetP7_1: P7.1 R18.2 U4.7 | length 111.2
  Top Layer w0.254: P7.1 1.2,42.8 1.2,85.808 3.642,88.25 39.75,88.25 40.5,87.5 51.25,87.5 v1(52.75,86)
  Bottom Layer w0.254: v1(52.75,86) 52.797,85.953 54.927,85.953 U4.7 55,84.5 55.5,84 55.5,81.025 R18.2@54.1,79.625
NetP7_2: P7.2 U2.10 | length 11.2
  Top Layer w0.254: P7.2 10,41.5 v1(13.75,41.5)
  Bottom Layer w0.254: v1(13.75,41.5) 13.75,41.545 16.125,43.92 U2.10
NetP7_3: P7.3 U4.13 U4.14 | length 109.3
  Top Layer w0.254: P7.3 8.873,37.873 4.065,37.873 0.4,41.538 0.4,86.3 5.35,91.25 46.25,91.25 v1(47.25,92.25)
  Bottom Layer w0.254: v1(47.25,92.25) 47.26,92.24 49.59,92.24 U4.13 U4.14
NetP8_1: P8.1 R23.2 | length 24.1
  Bottom Layer w0.254: P8.1 9.222,15.222 9.222,18.265 15.458,24.5 R23.2
NetP9_1: P9.1 R24.1 U2.8 | length 66.8
  Top Layer w0.254: v1(19,41.75) 24,41.75 v1(24.75,42.5) ; P9.1 44.915,35.585 49.665,35.585 53,32.25 v1(53,20.8)
  Bottom Layer w0.254: U2.8 18.563,41.38 18.933,41.75 v1(19,41.75) ; v1(24.75,42.5) 27.5,42.5 28.287,43.287 37.213,43.287 P9.1 ; v1(53,20.8) 56,17.8 R24.1
NetP9_2: P9.2 R26.2 U2.9 | length 33.8
  Top Layer w0.254: v1(18.333,42.65) 19.183,43.5 v1(24.25,43.5)
  Bottom Layer w0.254: U2.9 v1(18.333,42.65) ; v1(24.25,43.5) 27,43.5 27.241,43.741 43.859,43.741 R26.2 45.6,40.6 P9.2
NetP10_2: P10.2 R27.1 | length 48.2
  Top Layer w0.254: v1(53.75,73.75) 61,66.5 v1(61,50.75)
  Bottom Layer w0.254: R27.1 46.125,78.9 51.275,73.75 v1(53.75,73.75) ; v1(61,50.75) 62.3,49.45 P10.2
NetP11_2: P11.2 VR8.2 | length 4.7
  Bottom Layer w0.254: P11.2 64.25,54.95 VR8.2
NetP11_3: P11.3 Q4.2 R23.1 VR5.2 VR6.2 VR7.2 | length 106.8
  Top Layer w0.254: v1(12.25,50.5) 12.316,50.5 16.566,54.75 v1(25.75,54.75) ; v1(23.5,25.5) v1(24.5,24.5)
  Bottom Layer w0.254: v1(12.25,50.5) 10.548,48.798 10.548,44.573 8.875,42.9 VR5.2 8.75,31.868 11.015,29.603 15.775,29.603 16.132,29.96 Q4.2 ; R23.1 21,26.282 20.411,26.871 20.411,28.004 21.486,29.079 21.486,29.946 Q4.2 ; v1(23.5,25.5) 23.5,28.222 21.762,29.96 Q4.2 ; v1(24.5,24.5) VR7.2 ; v1(25.75,54.75) 26.5,55.5 VR6.2 ; VR6.2@26.625,56.9 31.652,51.873 63.673,51.873 P11.3
NetP12_1: P12.1 R36.2 | length 5.5
  Bottom Layer w0.254: R36.2 P12.1
NetP12_2: P12.2 R35.2 | length 14.7
  Bottom Layer w0.254: P12.2 7.5,78.437 11.244,82.181 13.406,82.181 14.625,83.4 R35.2
NetP12_3: P12.3 R33.1 | length 6.3
  Bottom Layer w0.254: R33.1 8,71 P12.3
NetP13_1: P13.1 R45.2 | length 13.8
  Top Layer w0.254: v1(16,67.5) 21.468,72.968 22.468,72.968 P13.1
  Bottom Layer w0.254: R45.2 v1(16,67.5)
NetP13_2: P13.2 R40.2 | length 11.6
  Bottom Layer w0.254: R40.2 14.875,73.9 16.902,71.873 23.873,71.873 P13.2
NetP14_1: P14.1 R42.2 | length 36.7
  Top Layer w0.254: v1(17,26.25) 27,26.25 28,27.25 28,31.75 v1(29.25,33)
  Bottom Layer w0.254: P14.1 9.25,26.25 v1(17,26.25) ; v1(29.25,33) 29.317,33 29.717,33.4 R42.2
NetP15_2: P15.2 VR12.2 | length 4.5
  Bottom Layer w0.254: P15.2 62.3,74.825 64.125,76.65 VR12.2
NetP15_3: P15.3 Q6.2 R42.1 VR9.2 VR10.2 VR11.2 | length 111.3
  Top Layer w0.254: v1(27,69.5) 27,57.25 29,55.25 29,47.5 28.411,46.911 28.411,44.416 29.486,43.341 29.486,42.474 Q6.2
  Bottom Layer w0.254: VR10.2 VR9.2 17.875,83.4 18.852,84.377 25.898,84.377 27.025,83.25 35.408,83.25 42.915,75.743 46.744,75.743 50.614,71.873 63.673,71.873 P15.3 ; v1(27,69.5) 26.373,70.127 26.373,80.873 27,81.5 VR11.2 ; Q6.2 29.5,41.352 31.5,39.352 R42.1
NetQ1_2: Q1.2 Q2.3 R5.2 | length 17.7
  Top Layer w0.254: Q1.2 48.56,29.96 48.905,29.615 48.905,29.555 50,28.46 v1(50,19.5)
  Bottom Layer w0.254: Q2.3 44.762,27.42 47.302,29.96 Q1.2 ; R5.2 v1(50,19.5)
NetQ3_2: Q3.2 Q4.3 R21.2 | length 13.8
  Top Layer w0.254: v1(20,33.75) 20,28.92 Q4.3 21.762,27.42 24.302,29.96 Q3.2
  Bottom Layer w0.254: v1(20,33.75) R21.2
NetQ5_2: Q5.2 Q6.3 R37.2 | length 13.6
  Top Layer w0.254: Q6.3 29.652,40.072 29.652,40.652 v1(30.5,41.5)
  Bottom Layer w0.254: v1(30.5,41.5) 31.46,42.46 Q5.2 ; Q5.2@33.56,42.46 33.905,42.115 33.905,42.055 35.5,40.46 35.5,38.25 34.5,37.25 R37.2
NetR3_1: R3.1 VR1.1 | length 3
  Bottom Layer w0.254: R3.1 VR1.1
NetR6_1: R6.1 VR2.1 | length 13.6
  Top Layer w0.254: v1(25,98) v1(28,95)
  Bottom Layer w0.254: VR2.1 23.625,99.5 24.953,98.172 24.953,98.047 v1(25,98) ; v1(28,95) 32.352,90.648 32.352,90.523 32.875,90 R6.1
NetR7_1: R7.1 R11.2 U2.7 | length 40
  Top Layer w0.254: v1(27,37.5) 29.572,34.928 37.072,34.928 40.3,31.7 v1(40.3,21)
  Bottom Layer w0.254: U2.7 22,40.375 24.875,37.5 R7.1 v1(27,37.5) ; v1(40.3,21) 40.3,19.159 R11.2
NetR11_1: R11.1 R12.1 U2.6 | length 41.3
  Top Layer w0.254: v1(29.25,36.75) 31.632,36.75 33,35.382 37.368,35.382 41.2,31.55 v1(41.2,21)
  Bottom Layer w0.254: U2.6 23.35,42.65 v1(29.25,36.75) ; v1(41.2,21) 41.2,20.359 R11.1 R12.1
NetR13_1: R13.1 VR3.1 | length 13.7
  Bottom Layer w0.254: VR3.1 27.023,98.977 27.273,98.977 35.352,90.898 35.352,90.523 35.875,90 R13.1
NetR14_1: R14.1 VR4.1 | length 3
  Bottom Layer w0.254: R14.1 VR4.1
NetR17_1: R17.1 VR5.1 | length 3
  Bottom Layer w0.254: R17.1 VR5.1
NetR18_1: R18.1 R19.1 U4.6 | length 10.1
  Bottom Layer w0.254: R18.1 R19.1 52,86.25 52.9,87.15 U4.6
NetR22_1: R22.1 VR6.1 | length 3
  Bottom Layer w0.254: R22.1 VR6.1
NetR27_2: R27.2 R32.2 U4.9 | length 13.5
  Bottom Layer w0.254: R32.2 R27.2 46.125,81 47.548,82.423 48.673,82.423 51.25,85 51.25,86.75 50.85,87.15 U4.9
NetR28_1: R28.1 VR7.1 | length 29.2
  Bottom Layer w0.254: VR7.1 33.25,24.5 35.727,22.023 41.876,22.023 43.453,23.6 R28.1
NetR29_1: R29.1 VR8.1 | length 3
  Bottom Layer w0.254: R29.1 VR8.1
NetR30_1: R30.1 U4.8 | length 4.2
  Bottom Layer w0.254: R30.1 46.125,87.4 47.645,85.88 U4.8
NetR30_2: R30.2 R31.2 U4.12 | length 7.2
  Bottom Layer w0.254: R31.2 R30.2 46.125,89.5 47.585,90.96 U4.12
NetR35_1: R35.1 VR9.1 | length 3
  Bottom Layer w0.254: R35.1 VR9.1
NetR38_2: R38.2 R39.1 U3.13 | length 15.5
  Bottom Layer w0.254: U3.13 32.625,70.23 31.998,70.857 31.998,73.998 35,77 36.725,77 38.1,78.375 R38.2 R39.1
NetR39_2: R39.2 R44.1 U3.14 | length 64.3
  Top Layer w0.254: v1(37.467,33.717) 37.5,33.684 37.5,21 v1(38.5,20) ; v1(37.5,37.25) v1(37.5,53)
  Bottom Layer w0.254: U3.14 33.1,72.475 R39.2@36,75.375 ; R39.2 R39.2@36,75.375 ; v1(37.467,33.717) 37.5,33.75 v1(37.5,37.25) ; v1(37.5,53) 36,54.5 36,61.75 36.827,62.577 36.827,66.489 36.423,66.893 36.423,69.506 36,69.929 R39.2@36,75.375 ; R44.1 v1(38.5,20)
NetR40_1: R40.1 VR10.1 | length 3.9
  Bottom Layer w0.254: R40.1 15.273,75.477 16.048,75.477 17.625,73.9 VR10.1
NetR41_1: R41.1 R43.2 U3.9 | length 9.7
  Top Layer w0.254: R41.1 34.344,60 34.844,60.5 R43.2
  Bottom Layer w0.254: U3.9 33.575,65.15 34.202,64.523 34.202,60.202 R41.1
NetR48_1: R48.1 VR11.1 | length 3
  Bottom Layer w0.254: R48.1 VR11.1
NetR49_1: R49.1 VR12.1 | length 3
  Bottom Layer w0.254: R49.1 VR12.1
"SAW out": J2.3 R7.2 | length 32.8
  Top Layer w0.254: J2.3 12,17.118 13.5,18.618 v1(13.5,30.5) ; v1(23.25,31.75) 23.25,32.4 v1(25,34.15)
  Bottom Layer w0.254: v1(13.5,30.5) 14.25,31.25 22.75,31.25 v1(23.25,31.75) ; v1(25,34.15) R7.2
"TRI out": J8.3 R44.2 | length 4.8
  Bottom Layer w0.254: J8.3 35.323,13.343 35.818,13.343 38.375,15.9 R44.2
pads on no net: J2.2 J5.2 J8.2 P1.11 P2.11 P3.3 P4.1 P4.11 P5.11 P6.11 P7.11 P8.3 P9.3 P9.11 P10.11 P11.1 P11.11 P12.11 P13.11 P14.3 P15.1 P15.11 U1.8 U1.10 U1.12 U2.12 U2.13 U2.14

## Polygon pours and split planes (outlines as drawn)
GND on Top Layer "NONET_L01_P-001" (solid, pour order 0): 1,1 1,105.5 68.8,105.5 68.8,1
GND on Bottom Layer "NONET_L01_P-001" (solid, pour order 1): 1,1 1,105.5 68.8,105.5 68.8,1

## Silkscreen, mask and mechanical layers (free items; w line width, h text height)
Bottom Overlay:
  drawing of 11 lines, arcs and shapes, not listed
  text "3x VCO" at 12.83,104.67 h0.7
  text "Jakub Orzechowski" at 12.92,103.58 h0.7
  text "SAW TUNE" at 16.213,28.25 h1.3
  text "TRIANGLE  / TUNE" at 17.344,14 h1.3
  text "BLEND / TUNE" at 17.344,6 h1.3
Mechanical 1:
  the board outline again, w0.254